# Altium PCB ife19_TS_BMS_MasterLTC6820.PcbDoc
Units mil, origin at the board's own origin, x right, y up, seen from the top; angles counter-clockwise.
Board outline 1245 x 605 mil, 2 copper layers (Top Layer, Bottom Layer); 13 components, 15 nets, 50 pads, 3 vias.
Unrouted connection lines stored in the file: 2.
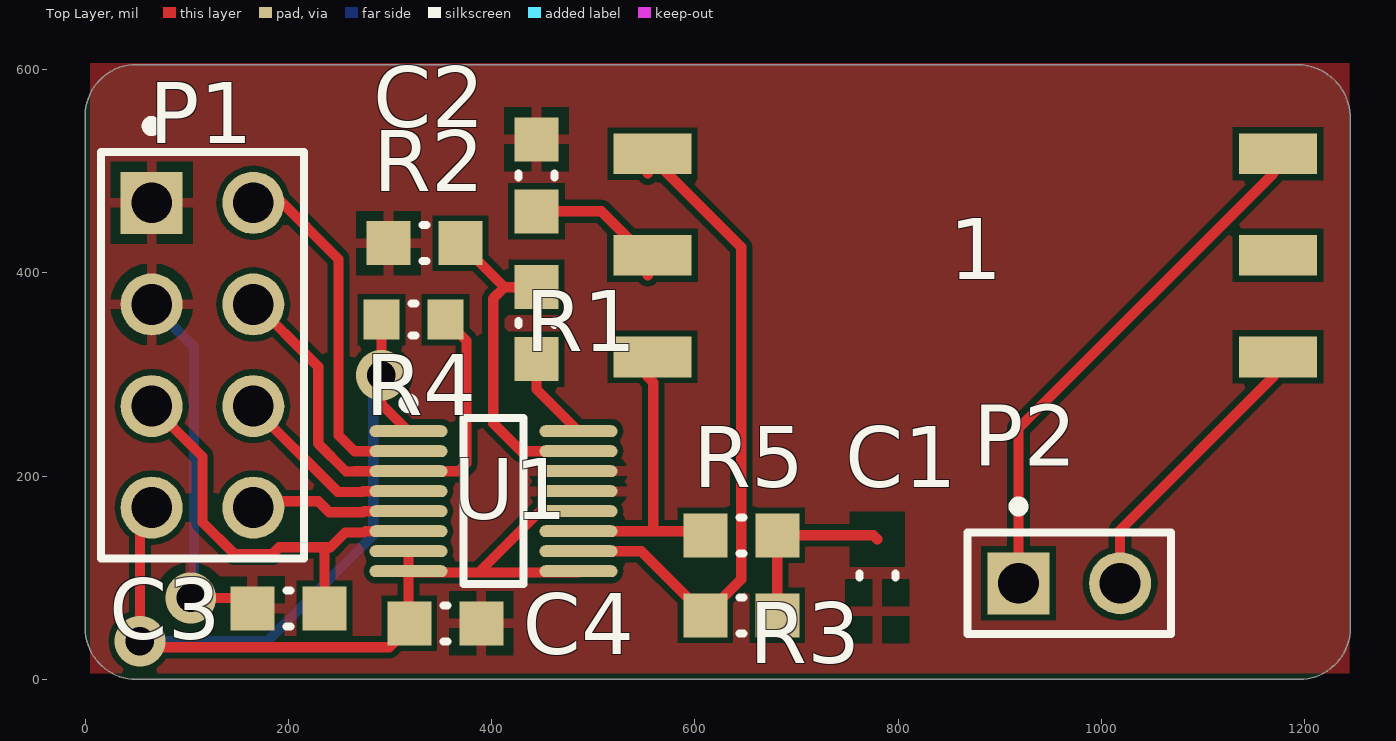
[diagram p0: Top Layer view]
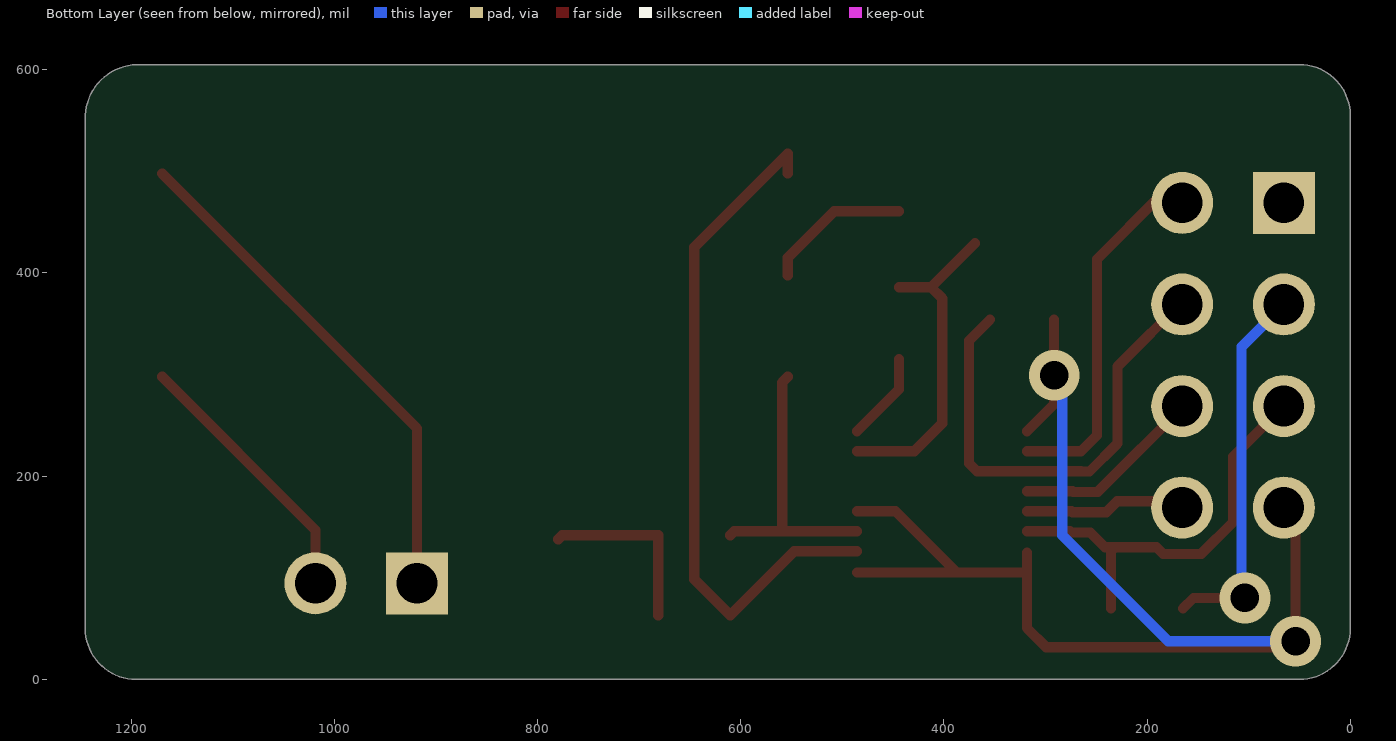
[diagram p1: Bottom Layer view, seen from below]

## Layer stack, top to bottom
Top Solder: solder mask 0.4, Solder Resist, Dk 3.5
Top Layer: signal copper 1.4
Dielectric 1: dielectric 12.6, FR-4, Dk 4.8
Bottom Layer: signal copper 1.4
Bottom Solder: solder mask 0.4, Solder Resist, Dk 3.5

## Board outline
50,0 cw(c50,50) 0,50 0,555 cw(c50,555) 50,605 1190,605 cw(c1192.5,552.5) 1245,555 1245,50 cw(c1195,50) 1195,0

## Design rules (kind name [scope] priority, off if disabled: settings)
Clearance [All] p1: gap=6 ignorepadtopadclearanceinfootprint=TRUE except(0: Arc-Hole Track-Hole SMDPad-Hole THPad-Hole Via-Hole Fill-Hole Poly-Hole Region-Hole Text-Hole; 10: Arc-Text Track-Text SMDPad-Text THPad-Text Via-Text Fill-Text Poly-Text Region-Text Text-Text)
PolygonConnect [All] p1: connectstyle=Relief reliefconductorwidth=10 reliefentries=4 polygonreliefangle="90 Angle" airgapwidth=10
RoomDefinition ife19_TS_BMS_MasterLTC6820 [InComponentClass('ife19_TS_BMS_MasterLTC6820')] p1: confinementstyle=ConfineIn formatcopy=TRUE lockcomponents=FALSE outline 5.12,5.98 1244.09,5.98 1244.09,606.3 5.12,606.3
RoutingVias [All] p1: holewidth=28 width=50 viastyle="Through Hole" minholewidth=28 minwidth=50 maxholewidth=28 maxwidth=50
SolderMaskExpansion [All] p1: expansion=4
Width [All] p1: maxlimit=10 minlimit=10 preferedwidth=10
30 further rules are at their usual default settings.

## Components (designator, comment, footprint, x,y, rotation, side; value= is the part's Value field where it differs from the comment)
1 "HM2108NL" HM2108NL 866.14,417.32 r90 top
C1 "CAP 10nF 100V 0603(1608)" CAPC0603(1608)100_M#1 779.53,102.36 r270 top value=10nF
C2 "CAP 10nF 100V 0603(1608)" CAPC0603(1608)100_M#2 444.09,496.06 r270 top value=10nF
C3 "CAP 1uF 100V 0603(1608)" CAPC0603(1608)100_M#2 200,69.76 r0 top value=10nF
C4 "CAP 1uF 100V 0603(1608)" CAPC0603(1608)100_M#2 354.33,55.12 r180 top value=10nF
P1 "TSW-104-08-L-D" SMTC-TSW-104-08-L-D_V 115.35,318.98 r270 top
P2 "TSW-102-07-S-S" SMTC-TSW-102-07-S-S 968.5,94.49 r0 top
R1 "1K 1% 0603(1608)" RESC0603(1608)_M 444.09,350.47 r90 top value="1000.00 Ohm"
R2 "1K 1% 0603(1608)" RESC0603(1608)_M 333.86,429.21 r180 top value="1000.00 Ohm"
R3 "51R 1% 0603(1608)" RESC0603(1608)_M 645.67,62.99 r0 top value="51.00 Ohm"
R4 "10K 1% 0603(1608)" RESC0603(1608)_N 323.03,354.02 r0 top value="2000.00 Ohm"
R5 "51R 1% 0603(1608)" RESC0603(1608)_M 645.67,141.73 r0 top value="51.00 Ohm"
U1 "LTC6820IMS#TRPBF" LT-MS-16_M 401.77,175.28 r0 top

## Footprints (in the part's own frame and the unit in brackets; to place one, negate y for a bottom-side part, rotate by r counter-clockwise, add the part's x,y. Pads: shape width x height; smd on the part's side, far side on the other; paste and mask are expansions set on the pad)
CAPC0603(1608)100_M#1 [mm] "Chip Capacitor, Body 1.6x0.8mm, Height 1.0mm, IPC Low Density"
  rect 1.1x1.1 on Mech1: 1(-0.9,0) 2(0.9,0)
  silkscreen extent -0.05,-0.45 0.05,0.45, body extent -0.87,-0.47 0.88,0.48, height 1
CAPC0603(1608)100_M#2 [mm] "Chip Capacitor, Body 1.6x0.8mm, Height 1.0mm, IPC Low Density"
  rect 1.1x1.1 smd: 1(-0.9,0) 2(0.9,0)
  silkscreen extent -0.05,-0.45 0.05,0.45, body extent -0.87,-0.47 0.88,0.48, height 1
HM2108NL [mil]
  rect 40.16x76.77 smd: 1(-100,-307.87) 2(0,-307.87) 3(100,-307.87) 4(100,307.87) 5(0,307.87) 6(-100,307.87)
  body extent -172,-282 173,282, height 226
LT-MS-16_M [mm] "SOP, 16-Leads, Body 4.04x3.00mm, Pitch 0.50mm, IPC Low Density"
  oval 1.95x0.3 smd: 1(-2.125,1.75) 2(-2.125,1.25) 3(-2.125,0.75) 4(-2.125,0.25) 5(-2.125,-0.25) 6(-2.125,-0.75) 7(-2.125,-1.25) 8(-2.125,-1.75) 9(2.125,-1.75) 10(2.125,-1.25) 11(2.125,-0.75) 12(2.125,-0.25) 13(2.125,0.25) 14(2.125,0.75) 15(2.125,1.25) 16(2.125,1.75)
  silkscreen extent -2.25,-2.08 0.75,2.57, body extent -1.55,-2.05 1.55,2.05, height 1.1
RESC0603(1608)_M [mm] "Chip Resistor, Body 1.6x0.8mm, IPC Low Density"
  rect 1.1x1.1 smd: 1(-0.9,0) 2(0.9,0)
  silkscreen extent -0.05,-0.45 0.05,0.45, body extent -0.85,-0.47 0.85,0.47, height 0.6
RESC0603(1608)_N [mm] "Chip Resistor, Body 1.6x0.8mm, IPC Medium Density"
  rect 0.9x1 smd: 1(-0.8,0) 2(0.8,0)
  silkscreen extent -0.05,-0.4 0.05,0.4, body extent -0.85,-0.47 0.85,0.47, height 0.6
SMTC-TSW-102-07-S-S [mm] "Header, 2-Leads, Body 5.08x2.54mm, Pitch 2.54mm"
  rect 1.55x1.55 hole 1.02: 1(-1.27,0)
  round 1.55 hole 1.02: 2(1.27,0)
  silkscreen extent -2.54,-1.27 2.54,2.04, body extent -2.54,-1.27 2.67,1.27, height 8.38
SMTC-TSW-104-08-L-D_V [mm] "CONN, 8-Leads, Body 10.16x5.08mm, Pitch 2.54mm"
  rect 1.55x1.55 hole 1.02: 1(-3.81,-1.27)
  round 1.55 hole 1.02: 2(-3.81,1.27) 3(-1.27,-1.27) 4(-1.27,1.27) 5(1.27,-1.27) 6(1.27,1.27) 7(3.81,-1.27) 8(3.81,1.27)
  silkscreen extent -5.85,-2.54 5.08,2.54, body extent -5.08,-2.54 5.08,2.54, height 8.38

## Part data
C1 C2 C3 C4: library part CMP-1035-02326-1, "CAP 10nF 100V ±20% 0603 (1608 Metric) Thickness 1mm SMD", Case-EIA=0603, Case-Metric=1608, Rated Voltage="100 V", Tolerance=±20%, Max Thickness="1 mm", Technology=SMT
P1: library part CMP-1681-00006-3, "Male Header, Pitch 2.54 mm, 2 x 4 Position, Height 8.38 mm, Tail Length 5.08 mm, -55 to 125 degC, RoHS, Bulk", Colour=Black, Current Rating="7.6 A", Package Quantity=1, Voltage Rating="550 V", Contact Finish=Gold, Contact Material=Bronze, Contact Plating=Gold, DatasheetVersion=04/2012, Lead Pitch="0.1 inch", Mount="Through Hole", Mounting Technology="Through Hole", PackageDescription="Male Header, Pitch 2.54 mm, 2 x 4 Position, Height 8.38 mm, Tail Length 5.08 mm", PackageReference=TSW-104-08-L-D, Packaging=Bulk, Pins=8, REACH SVHC="No SVHC", RoHSCompliant=true, Rows=2
P2: library part CMP-1681-00004-4, "Male Header, Pitch 2.54 mm, 1 x 2 Position, Height 8.38 mm, Tail Length 2.54 mm, -55 to 125 degC, RoHS, Bulk", Colour=Black, Manufacturer=Samtec, Max Operating Temperature="125 degC", Min Operating Temperature="-55 degC", Package Quantity=1, ComponentLink1Description="Manufacturer URL", ComponentLink1URL=http://www.samtec.com/, ComponentLink2Description=Datasheet, ComponentLink2URL=http://suddendocs.samtec.com/catalog_english/tsw_th.pdf, Contact Finish=Gold, Contact Material=Bronze, Contact Plating=Gold, DatasheetVersion=12/2015, Height="8.38 mm", Lead Pitch="0.1 inch", Length="5.08 mm", Mount="Through Hole", Mounting Technology="Through Hole", PackageDescription="Male Header, Pitch 2.54 mm, 1 x 2 Position, Height 8.38 mm, Tail Length 2.54 mm", PackageReference=TSW-102-07-S-S, Packaging=Bulk, Pins=2, REACH SVHC="No SVHC", RoHSCompliant=true, Rows=1
R1 R2: library part CMP-1012-00510-1, "1K 0.1W 1% 0603 (1608 Metric)  SMD", Case-EIA=0603, Case-Metric=1608, Power="0.1 W", Tolerance="1 %", Technology=SMT
R3 R5: library part CMP-1012-00364-1, "51R 0.1W 1% 0603 (1608 Metric)  SMD", Case-EIA=0603, Case-Metric=1608, Power="0.1 W", Tolerance="1 %", Technology=SMT
R4: library part CMP-1012-00542-1, "2K 0.1W 1% 0603 (1608 Metric)  SMD", Case-EIA=0603, Case-Metric=1608, Power="0.1 W", Tolerance="1 %", Technology=SMT
U1: library part CMP-0937-00011-1, "IsoSPI Isolated Communication Interface, 2.7 to 5.5 V, -40 to 85 degC, 16-Pin MSOP (MS), Pb-Free, Tape and Reel", IO Supply Current="1 uA Max.", IO Supply Voltage Range="1.7 to 5.5 V", Manufacturer="Linear Technology", Power Supply="2.7 to 5.5 V", Receiver Input Resistance="35 kOhm", Supply Current, IDLE State="2 uA", Temperature Range (degC)="-40 to 85", ComponentLink1Description="Manufacturer URL", ComponentLink1URL=http://www.linear.com/, ComponentLink2Description=Datasheet, ComponentLink2URL=http://cds.linear.com/docs/en/datasheet/6820fa.pdf, ComponentLink3Description="Package Specification", ComponentLink3URL=http://cds.linear.com/docs/en/packaging/05081669_A_MS16.pdf, DatasheetVersion="Rev. A", Mounting Technology="Surface Mount", PackageDescription="16-Pin Micro Small Outline Package, Body 4.039 x 3 mm, Pitch 0.5 mm", PackageReference=MS-16, PackageVersion="Rev. A", Packing="Tape and Reel", PartNumber=LTC6820IMS#TRPBF, VBIAS="1.9 to 2.1 V"
1: DeviceSetName=HM2108NL, GateName_1=G$1, LibraryName="Transformers and Chokes", Package=HM2108NL, SymbolName_1=HM2108NL

## Via types
v1: diameter 50, hole 28, Top Layer to Bottom Layer, 3 vias

## Nets (pads, with @x,y where several pads share a name; then routed paths per layer and width w, separated by ;. In a path a pad name is that pad's centre, name@x,y a point inside that pad or via, vN(x,y) a via of type N, cw(c..) or ccw(c..) an arc to the next point about the centre after c; other vN are vias at no path point)
CS: P1.8 U1.5 | length 161.4
  Top Layer w10: P1.8@161.61,175.28 229.32,175.28 240.11,164.49 273.46,164.49 274.41,165.43 U1.5
GND: C1.2 C2.1 C3.1 C4.1 P1.1 P1.3 R2.2 U1.13 U1.14 | length 372.5
  Top Layer w10: v1(103.7,80.08) 154.25,80.08 C3.1
  Bottom Layer w10: P1.3 106.87,327.46 106.87,83.24 v1(103.7,80.08)
IBIAS: R1.1 U1.16 | length 88
  Top Layer w10: R1.1 444.09,285.51 U1.16
ICMP: R1.2 R2.1 U1.15 | length 326.5
  Top Layer w10: R2.1 412.6,385.91 ; R1.2 412.6,385.91 ; U1.15 429.06,224.49 401.57,251.97 401.57,374.88 412.6,385.91
IM: 1.6 R5.1 U1.11 | length 280.7
  Top Layer w10: U1.11 559.06,145.75 ; 1.6@553.55,297.72 559.06,292.21 559.06,145.75 ; R5.1 606.22,145.75 559.06,145.75
IP: 1.4 R3.1 U1.10 | length 677.7
  Top Layer w10: U1.10 547.17,126.06 R3.1 645.67,98.43 645.67,170.82 645.67,425.2 553.55,517.32 1.4@553.55,497.72
MISO: P1.4 R4.2 U1.3 | length 482
  Top Layer w10: P1.4@161.61,375.28 229.21,307.68 229.21,231.95 256.68,204.49 264.96,204.49 265.28,204.8 U1.3 367.32,204.8 375.2,212.68 375.2,333.35 R4.2
MOSI: P1.2 U1.2 | length 361.9
  Top Layer w10: P1.2@161.61,475.28 187.4,475.28 249.21,413.46 249.21,240.24 264.96,224.49 U1.2
Net1_1: 1.1 P2.2 | length 249.9
  Top Layer w10: P2.2@1018.5,110.24 1018.5,146.93 1.1@1169.29,297.72
Net1_3: 1.3 P2.1 | length 491.4
  Top Layer w10: P2.1@918.5,110.24 918.5,246.93 1.3@1169.29,497.72
Net1_5: 1.5 C2.2 | length 145.6
  Top Layer w10: C2.2 507.87,460.63 553.55,414.96 1.5@553.55,397.72
NetC1_1: C1.1 R3.2 R5.2 | length 178.8
  Top Layer w10: R3.2 R5.2 775.59,141.73 779.53,137.8
SCK: P1.6 U1.4 | length 196.7
  Top Layer w10: P1.6@161.61,275.28 161.61,271.27 248.39,184.49 272.83,184.49 273.46,185.12 U1.4
VDD: C4.2 P1.7 R4.1 U1.1 U1.7 U1.8 U1.9 U1.12 | length 1333.8
  Top Layer w10: P1.7 53.78,157.4 v1(53.78,37.47) 53.78,31.5 299.21,31.5 318.11,50.39 U1.8@318.11,105.16 ; R4.1 291.54,270.75 U1.1 ; U1.7@318.11,124.84 U1.8 U1.8@318.11,105.16 ; U1.9@485.43,105.16 387.24,105.16 ; U1.12 447.52,165.43 387.24,105.16 ; U1.8@318.11,105.16 387.24,105.16
  Bottom Layer w10: v1(53.78,37.47) 179.2,37.47 283.46,141.73 283.46,291.34 v1(291.34,299.21)
VDDS: C3.2 P1.5 U1.6 | length 421.8
  Top Layer w10: P1.5 115.35,218.98 115.35,154.61 146.5,123.46 184.21,123.46 190.74,130 231.5,130 ; C3.2 235.43,126.06 231.5,130 ; U1.6 275.67,145.75 274.41,144.49 255.83,144.49 241.34,130 231.5,130
pads on no net: 1.2

## Polygon pours and split planes (outlines as drawn)
GND on Top Layer "GNDPlane" (solid, pour order 0): 5.12,606.3 1244.09,606.3 1244.09,5.98 5.12,5.98

## Silkscreen, mask and mechanical layers (free items; w line width, h text height)
Mechanical 1:
  lines w1.97: 600,610 605,605 1245,605
Mechanical 22:
  the board outline again, w10